# EAGLE board System critical signals PCB (1) (EAGLE 9.6.2)
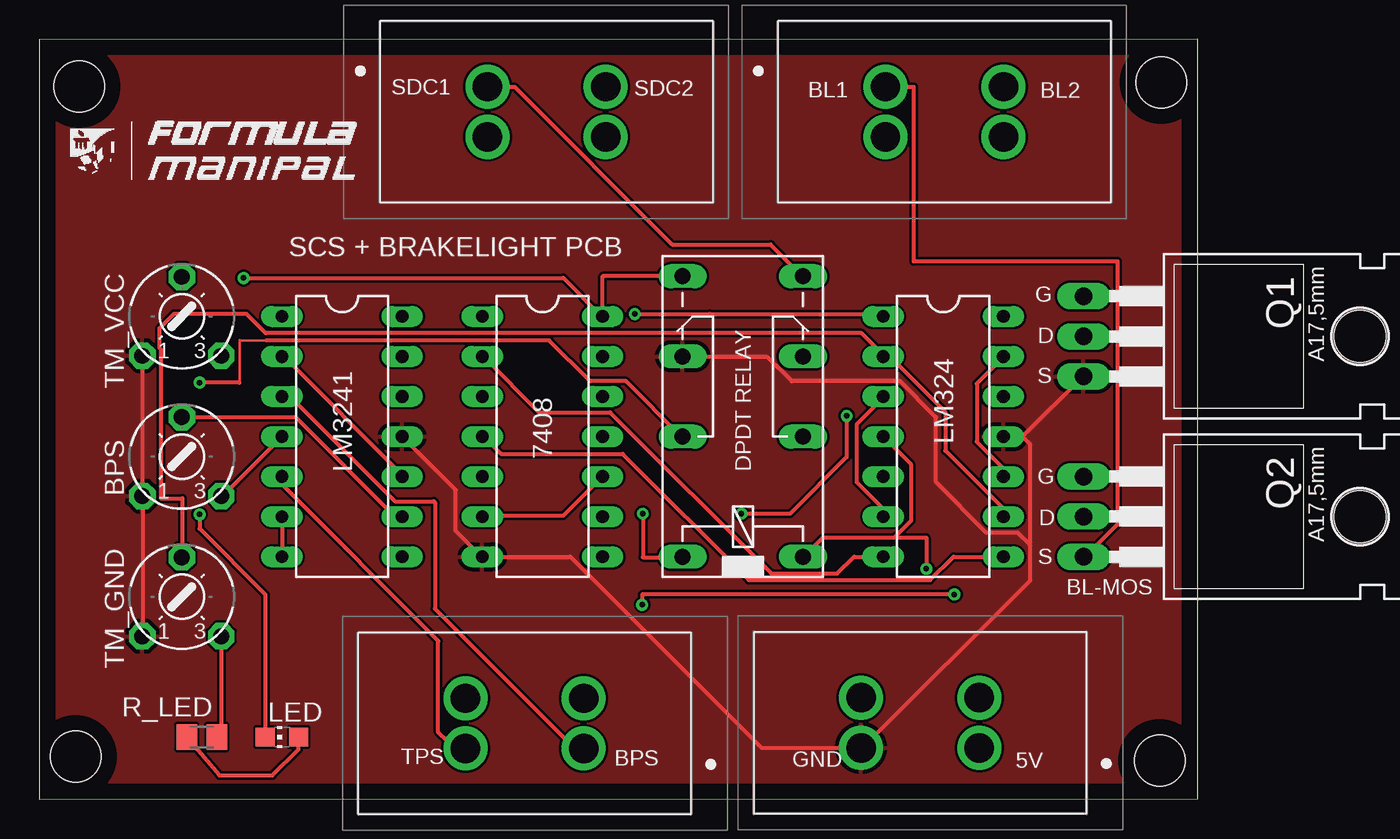
[diagram p0: board, top side]
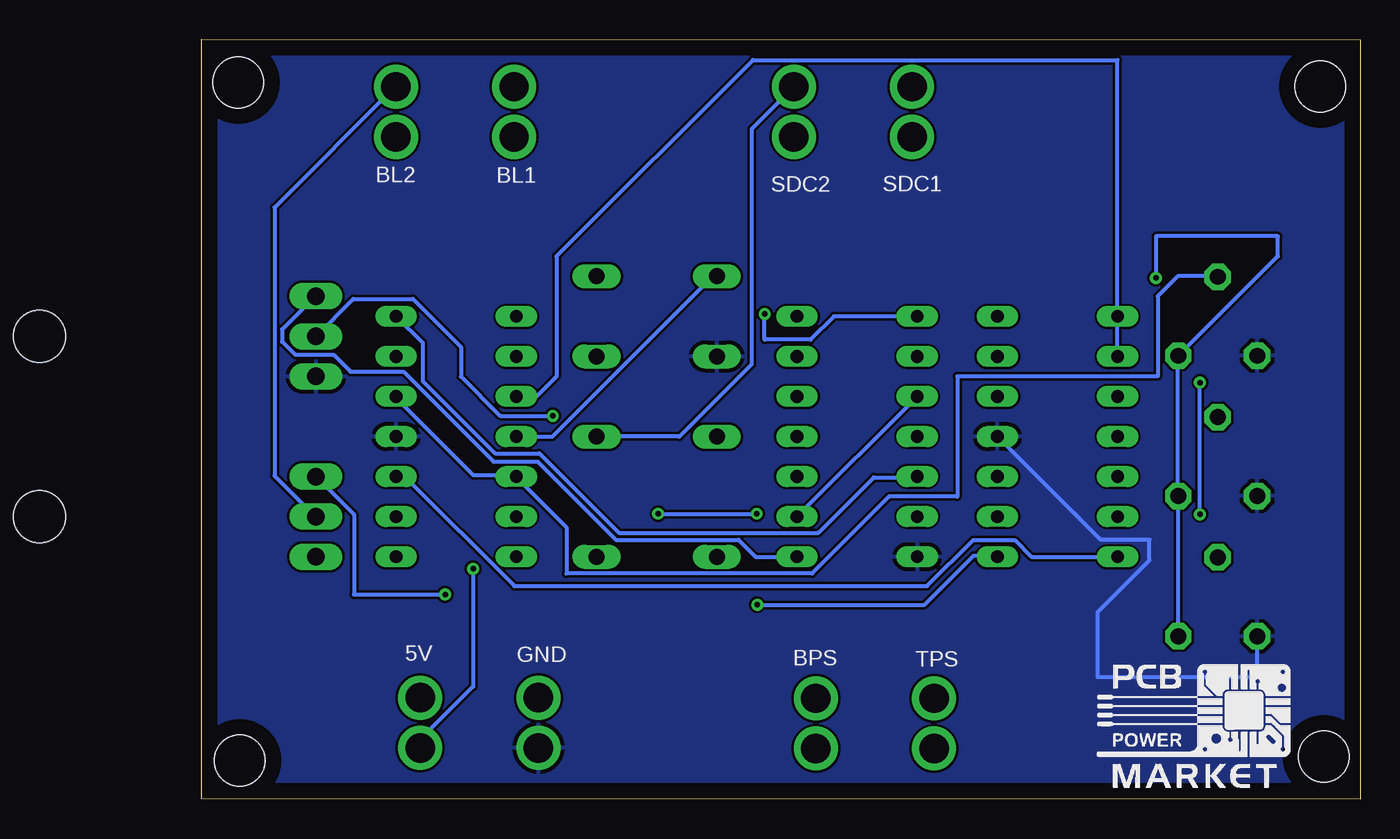
[diagram p1: board, bottom side, seen from below]

Size 73.41 x 48.16 mm. Coordinates in mm from the lower left corner, seen from the top.
Outline: 0,0 73.41,0.04 73.41,48.16 0,48.15 0,0
Copper layers (1*16): Top 0.035mm / dielectric 1.5mm / Bottom 0.035mm
Design rules "default": minimum track width 6mil, minimum drill 0.35mm, track to track 6mil, track to pad 6mil, pad to pad 6mil, via to via 6mil, smd to smd 6mil, copper to edge 40mil, drill to drill 6mil, minimum pad ring 10mil, minimum via ring 8mil, stop-mask expansion 4mil, vias tented up to drill 0mil, thermal gap 10mil
Holes 3.2 mm at 2.51,45.18 71.09,45.43 2.29,2.7 70.99,2.44

## Footprints (pad centres in the part's own frame; a part is rotated, then mirrored left to right if it is on the bottom)
DIL14 = drill 0.813 long: 1 -7.62,-3.81; 2 -5.08,-3.81; 3 -2.54,-3.81; 4 0,-3.81; 5 2.54,-3.81; 6 5.08,-3.81; 7 7.62,-3.81; 8 7.62,3.81; 9 5.08,3.81; 10 2.54,3.81; 11 0,3.81; 12 -2.54,3.81; 13 -5.08,3.81; 14 -7.62,3.81
6MM = drill 1 pad 1.676 octagon: A -2.5,-2.5; E 2.5,-2.5; S 0,2.5
431600102 = drill 1.86 pad 2.79: 1 0,0; 2 0,3.18; 3 -7.49,0; 4 -7.49,3.18
351 = drill 1.016 long: 1 -3.81,-3.81; 16 -3.81,3.81; O1 8.89,-3.81; O2 8.89,3.81; P1 3.81,-3.81; P2 3.81,3.81; S1 13.97,-3.81; S2 13.97,3.81
CHIP-LED0805 = smd 1.2 x 1.2: A 0,-1.05; C 0,1.05
TO220BH = drill 1.118 long: D 0,-6.35; G -2.54,-6.35; S 2.54,-6.35 | hole 3.302: 0,11.176
M0805 = smd 1.3 x 1.6: 1 -0.95,0; 2 0.95,0

## Placement (x,y rotation side)
7408  74HC08N  [DIL14]  31.88,22.99 270 top
BPS  [6MM]  9.02,21.72 0 top
J1  43160-0102  [431600102]  59.56,3.25 0 top
J2  43160-0102  [431600102]  34.49,3.21 0 top
J3  43160-0102  [431600102]  53.61,45.16 180 top
J4  43160-0102  [431600102]  28.39,45.16 180 top
K1  351  [351]  44.58,19.18 90 top
LED  [CHIP-LED0805]  15.37,3.94 90 top
LM324  ICL7641DP  [DIL14]  57.28,22.99 270 top
LM3241  ICL7641DP  [DIL14]  19.18,22.99 270 top
Q1  IRLZ44Z  [TO220BH]  72.52,29.34 270 top
Q2  IRLZ44Z  [TO220BH]  72.52,17.91 270 top
R_LED  300  [M0805]  10.29,3.94 0 top
TM_GND  [6MM]  9.02,12.83 0 top
TM_VCC  [6MM]  9.02,30.61 0 top

## Library data of the parts
7408 = 74xx-eu
BPS TM_GND TM_VCC = adafruit
J1-J4 = 43160-0102; DESCRIPTION: Molex SABRE 43160, 7.5mm Pitch, 2 Way, 1 Row PCB Header, Through Hole; HEIGHT: 14.86mm; MANUFACTURER_NAME: Molex; MANUFACTURER_PART_NUMBER: 43160-0102; MOUSER_PART_NUMBER: 538-43160-0102; MOUSER_PRICE-STOCK: https://www.mouser.co.uk/ProductDetail/Molex/43160-0102?qs=P7cO%252B%252BFDLzSKycDBXp4ZKQ%3D%3D
K1 = relay; OC_FARNELL: unknown; OC_NEWARK: unknown
LED = led
LM324 LM3241 = maxim; OC_FARNELL: unknown; OC_NEWARK: unknown
Q1 Q2 = transistor-power
R_LED = rcl; SPICEPREFIX: R

## Nets
GND: 7408.7 BPS.A J1.3 K1.O2 LM324.11 LM3241.11 Q1.S TM_GND.A TM_VCC.A
N$1: 7408.4 LM324.8
N$2: LM324.3 LM324.6 LM3241.1 LM3241.2 LM3241.10
N$3: LM324.10 LM324.13 LM3241.6 LM3241.7
N$4: 7408.5 LM324.14
N$5: 7408.1 LM324.1
N$6: 7408.2 LM324.7
N$7: 7408.3 7408.9
N$8: 7408.6 7408.10
N$9: 7408.8 Q1.G
N$10: K1.16 Q1.D
N$11: J4.1 K1.S1
N$12: J4.3 K1.P1
N$13: LED.A R_LED.1
N$14: BPS.S LM3241.9
N$15: LM3241.8 Q2.G
N$16: J3.3 Q2.D
N$17: J3.1 Q2.S
N$18: K1.P2 LED.C
N$19: J2.1 LM3241.3
N$20: J2.3 LM3241.5
N$23: LM324.2 LM324.9 TM_GND.S
N$25: LM324.5 LM324.12 TM_VCC.S
VCC: 7408.14 BPS.E J1.1 K1.1 K1.S2 LM324.4 LM3241.4 R_LED.2 TM_GND.E TM_VCC.E

## Tracks (layer width: path | path; a pad name or v marks a point on that pad's centre or on a via)
GND
  Top 0.254: LM3241.11 26.38,19.6 26.38,17 28.02,15.37 7408.7 33.66,15.37 45.77,3.25 J1.3 52.17,3.25 62.76,13.84 62.76,16.13 62.73,16.16 | TM_GND.A 6.53,10.44 6.53,19.13 BPS.A 6.53,19.28 6.53,27.96 TM_VCC.A | 62.31,22.99 66.12,26.8 Q1.S | 62.73,16.16 62.76,16.2 62.76,22.53 62.31,22.99 | K1.O2 40.82,28.02 46.15,28.02 47.68,26.49 54.53,26.49 56.82,24.21 56.82,20.1 60.03,16.89 62,16.89 62.73,16.16 | 62.31,22.99 LM324.11
  Bottom 0.254: LM3241.11 16.44,16.44 13.35,16.44 13.35,15.14 16.64,11.85 16.64,7.75 6.52,7.75 6.51,7.75 TM_GND.A
  pour Top: 0,48.07 0,0.51 0.25,0.25 73.41,0.25 73.47,0.19 73.47,47.75 73.22,48.01 0.06,48.01
  pour Bottom: -0.06,-0.06 0.06,-0.19 73.28,-0.19 73.66,0.19 73.66,47.82 73.47,48.01 -0.06,48.01
N$1
  Top 0.254: LM324.8 57.92,15.37 56.44,13.89 44.96,13.89 36.96,21.89 29.26,21.89 28.17,22.99 7408.4
N$2
  Top 0.254: LM324.6 53.47,18.41 51.79,20.09 51.79,23.75 53.47,25.43 LM324.3 | LM3241.10 22.99,20.55 15.37,28.17 LM3241.2
  Bottom 0.254: LM324.3 52.2,25.53 50.93,26.8 50.93,34.42 38.49,46.86 15.37,46.86 LM3241.1 LM3241.2
N$3
  Top 0.254: LM3241.6 LM3241.7 | LM324.10 61.09,20.97 59.41,22.65 59.41,26.34 61.09,28.02 LM324.13
  Bottom 0.254: LM3241.7 20.82,15.37 21.88,16.43 24.52,16.43 27.44,13.51 53.6,13.51 60.48,20.4 61.09,20.4 LM324.10
N$4
  Bottom 0.254: LM324.14 59.41,28.93 59.41,26.49 54.83,21.91 52,21.91 46.97,16.88 34.33,16.88 30.82,20.4 28.17,20.4 7408.5
N$5  (via drill 0.35)
  Top 0.254: LM324.1 53.31,30.76 42.49,30.76 v37.73,30.76
  Bottom 0.254: 7408.1 33.35,30.61 34.83,29.13 37.73,29.13 v37.73,30.76
N$6
  Top 0.254: LM324.7 51.62,15.37 50.56,14.3 46.38,14.3 36.17,24.51 31.67,24.51 28.17,28.02 7408.2
N$7
  Bottom 0.254: 7408.9 7408.3
N$8
  Top 0.254: 7408.10 33.2,17.96 28.17,17.96 7408.6
N$9
  Bottom 0.254: 7408.8 38.31,15.37 39.38,16.43 47.16,16.43 52.12,21.39 54.92,21.39 60.63,27.1 63.98,27.1 65.05,28.17 67.49,28.17 68.31,29 68.31,29.78 66.27,31.83 Q1.G
N$10  (via drill 0.35)
  Top 0.254: v51.16,24.3 51.16,21.69 47.57,18.09 v44.48,18.09 | v38.24,18.09 38.24,15.34 40.73,15.34 K1.16
  Bottom 0.254: Q1.D 63.8,31.7 60.02,31.7 56.97,28.66 56.97,26.77 54.5,24.3 v51.16,24.3 | v44.48,18.09 v38.24,18.09
N$11
  Top 0.254: K1.S1 48.28,33.2 46.33,35.15 40.1,35.15 30.1,45.16 J4.1
N$12
  Bottom 0.254: J4.3 38.56,42.48 38.56,27.55 43.13,22.99 K1.P1
N$13
  Top 0.254: R_LED.1 11.41,1.5 14.76,1.5 16.42,3.16 LED.A
N$14
  Top 0.254: BPS.S 16.23,24.22 22.49,17.96 22.99,17.96 LM3241.9
N$15  (via drill 0.35)
  Top 0.254: v57.98,12.98 38.2,12.98 v38.2,12.32
  Bottom 0.254: Q2.G 63.75,18.03 63.75,12.98 v57.98,12.98 | v38.2,12.32 27.6,12.32 24.48,15.44 23.06,15.44 LM3241.8
N$16
  Bottom 0.254: J3.3 61.15,45.16 68.8,37.5 68.8,20.49 66.27,17.96 Q2.D
N$17
  Top 0.152: 68.33,32.26 68.31,32.25
  Top 0.254: 68.31,32.25 68.31,17.41 66.27,15.37 Q2.S | J3.1 55.4,45.16 55.4,34.1 68.33,34.1 68.33,32.26
N$18  (via drill 0.35)
  Top 0.152: 14.38,29.08 12.69,29.08 12.68,29.09 12.67,29.08 12.67,26.41
  Top 0.254: 14.38,29.08 32.3,29.08 34.9,26.49 37.16,26.49 40.66,22.99 K1.P2 | 12.67,26.41 v10.14,26.41 | LED.C 14.32,12.98 10.14,17.15 v10.14,18.06
  Bottom 0.254: v10.14,18.06 v10.14,26.41
N$19
  Top 0.254: LM3241.3 15.37,25.43 15.98,25.43 22.53,18.87 25.01,18.87 25.06,18.82 25.06,12.07 33.92,3.21 J2.1
N$20
  Top 0.254: LM3241.5 15.37,19.94 25.27,10.03 25.27,4.24 25.86,3.66 J2.3
N$23
  Top 0.254: LM324.9 61.09,18.41 57.41,22.09 57.41,24.54 53.89,28.07 LM324.2 53.47,28.17 52.1,29.53 14.35,29.53 13.12,30.76 8.51,30.76 7.59,29.84 7.59,28.63 7.7,28.52 7.7,19.07 9.05,19.07 9.05,15.37 TM_GND.S
N$25
  Bottom 0.254: LM324.12 61.09,25.43 56.21,20.55 53.47,20.55 LM324.5 53.47,20.4 50.3,17.23 50.3,14.3 34.72,14.3 29.84,19.18 25.53,19.18 25.53,26.8 12.83,26.8 12.83,31.88 11.56,33.15 9.06,33.15 TM_VCC.S
VCC  (via drill 0.35)
  Top 0.254: R_LED.2 11.25,3.97 11.52,4.24 TM_GND.E | LM3241.4 11.66,19.28 BPS.E | K1.S2 35.69,33.15 7408.14 35.64,30.61 33.2,33.04 v12.94,33.04 | LM324.4 55.25,21.21 55.25,17.65 54.19,16.59 | 54.19,16.59 49.66,16.59 48.44,15.37 K1.1 | v56.21,14.61 56.21,16.59 54.19,16.59
  Bottom 0.254: TM_GND.E 11.56,10.44 11.56,19.13 BPS.E 11.56,19.28 11.56,27.96 TM_VCC.E 5.21,34.42 5.21,35.69 12.94,35.69 v12.94,33.04 | LM324.4 51.18,22.99 41.12,33.05 40.82,33.05 K1.S2 | v56.21,14.61 56.21,7.14 59.72,3.63 59.72,3.32 J1.1

## Text on the board
tPlace: SDC1 | SDC2 | BL1 | BL2 | SCS + BRAKELIGHT PCB | G | D | S | DPDT RELAY | G | D | S | BL-MOS | TPS | BPS | GND | 5V
bPlace: SDC1 | SDC2 | BL1 | BL2 | GND | 5V | TPS | BPS
tNames: SHUTDOWN | BRAKELIGHT | SENSORS | POW-GND